# Altium PCB Misaka-v1.0.PcbDoc (part 1 of 2)
Units mm, origin at the board's own origin, x right, y up, seen from the top; angles counter-clockwise.
Board outline 100 x 100 mm, 2 copper layers (Top Layer, Bottom Layer); 149 components, 122 nets, 881 pads, 13 vias.
Unrouted connection lines stored in the file: 482.
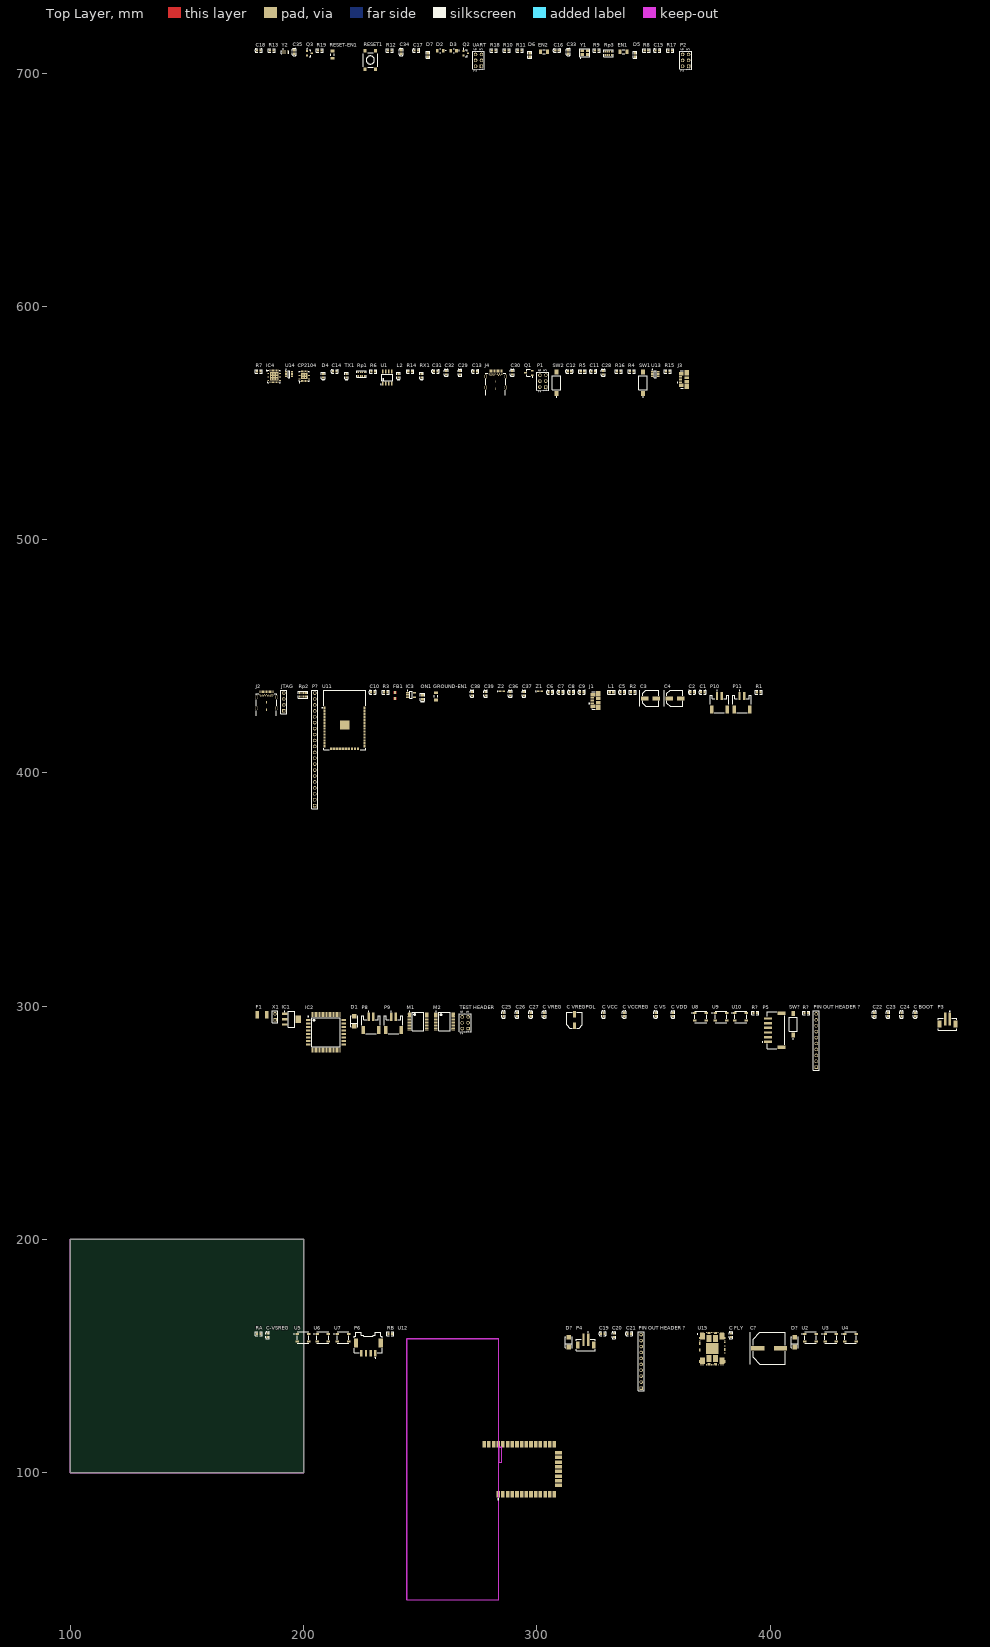
[diagram p0: Top Layer view]
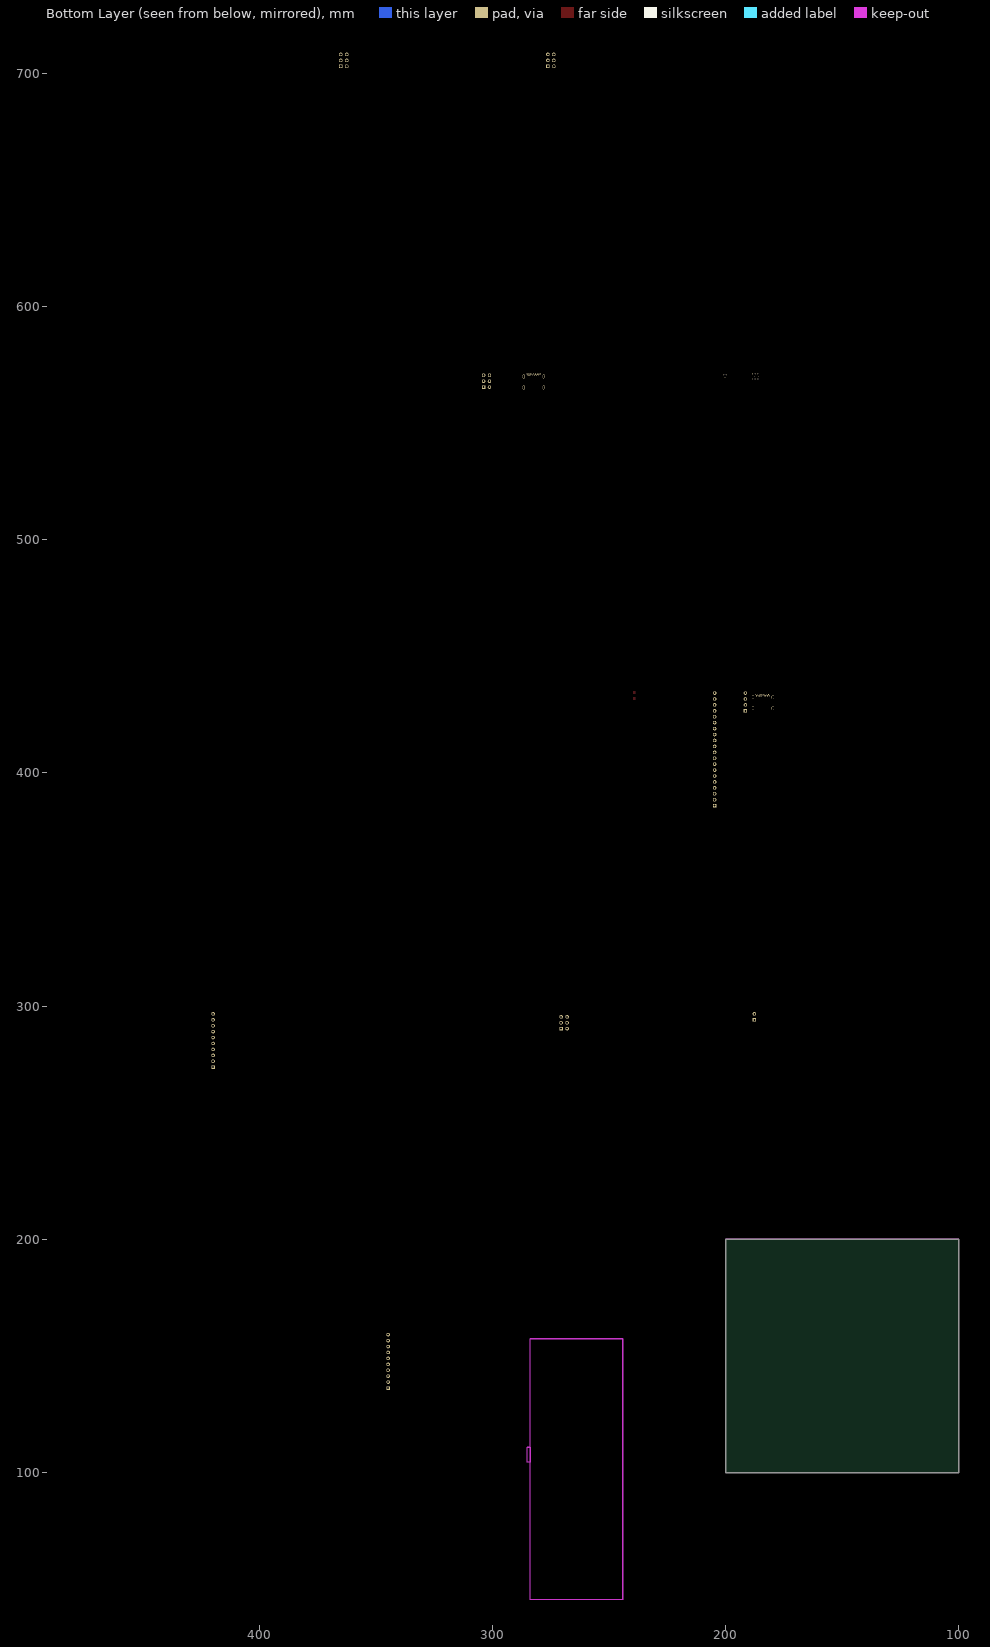
[diagram p1: Bottom Layer view, seen from below]

## Layer stack, top to bottom
Top Solder: solder mask 0.0102, Solder Resist, Dk 3.5
Top Layer: signal copper 0.0356
Dielectric 1: dielectric 0.32, FR-4, Dk 4.8
Bottom Layer: signal copper 0.0356
Bottom Solder: solder mask 0.0102, Solder Resist, Dk 3.5

## Board outline
100,100 100,200 200,200 200,100

## Design rules (kind name [scope] priority, off if disabled: settings)
Clearance [All] p1: gap=0.254 ignorepadtopadclearanceinfootprint=FALSE except(0: Arc-Hole Track-SMDPad Track-Hole SMDPad-Fill SMDPad-Poly SMDPad-Region SMDPad-Hole THPad-Hole Via-Hole Fill-Hole Poly-Hole Region-Hole Text-Hole; 0.15: THPad-THPad; 0.2: SMDPad-SMDPad; 0.253: SMDPad-THPad)
PolygonConnect [All] p1: connectstyle=Relief reliefconductorwidth=0.254 reliefentries=4 polygonreliefangle="90 Angle" airgapwidth=0.254
RoomDefinition Misaka-v1.0 [InComponentClass('Misaka-v1.0')] p1: confinementstyle=ConfineIn formatcopy=TRUE lockcomponents=FALSE outline 178.943,26.924 480.568,26.924 480.568,713.359 178.943,713.359
RoutingVias [All] p1: holewidth=0.711 width=1.27 viastyle="Through Hole" minholewidth=0.711 minwidth=1.27 maxholewidth=0.711 maxwidth=1.27
SolderMaskExpansion [All] p1: expansion=0.102 istentingtop=FALSE
Width [All] p1: maxlimit=0.254 minlimit=0.254 preferedwidth=0.254
30 further rules are at their usual default settings.

## Components (designator, comment, footprint, x,y, rotation, side; value= is the part's Value field where it differs from the comment)
C1 "100nF" 0603_C 371.094,434.594 r0 top
C2 "100nF" 0603_C 366.522,434.594 r0 top
C3 "EEEFP1V470AP" PNSC-FP-V-D_V 348.742,431.927 r0 top
C4 "EEEFP1V470AP" PNSC-FP-V-D_V 359.156,431.927 r0 top
C5 "1uF (105) 10% 50V" 0603_C 336.55,434.594 r0 top
C6 "100nF" 0603_C 305.689,434.594 r0 top
C7 "100nF" 0603_C 310.261,434.594 r0 top
C8 "100nF" 0603_C 314.706,434.594 r0 top
C9 "100nF" 0603_C 319.278,434.594 r0 top
C10 "1uF (105) 10% 50V" 0603_C 229.616,434.594 r0 top
C11 "100nF" 0603_C 324.104,572.135 r0 top
C12 "100nF" 0603_C 313.944,572.135 r0 top
C13 "100nF" 0603_C 273.558,572.135 r0 top
C14 "100nF" 0603_C 213.36,572.135 r0 top
C15 "22pF (220) 5% 50V" 0603_C 351.536,709.676 r0 top
C16 "22pF (220) 5% 50V" 0603_C 308.61,709.676 r0 top
C17 "22pF (220) 5% 50V" 0603_C 248.285,709.676 r0 top
C18 "100nF" 0603_C 180.721,709.676 r0 top
C19 "100nF (104) 10% 50V" 0603_C 328.168,159.512 r0 top
C20 "100nF (104) 10% 50V" 0603_C 332.994,158.877 r90 top
C21 "100nF (104) 10% 50V" 0603_C 339.598,159.512 r0 top
C22 "100nF (104) 10% 50V" 0603_C 444.627,296.418 r90 top
C23 "100nF (104) 10% 50V" 0603_C 450.469,296.418 r90 top
C24 "100nF (104) 10% 50V" 0603_C 456.311,296.418 r90 top
C25 "100nF (104) 10% 50V" 0603_C 285.623,296.418 r90 top
C26 "100nF (104) 10% 50V" 0603_C 291.465,296.418 r90 top
C27 "100nF (104) 10% 50V" 0603_C 297.307,296.418 r90 top
C28 "100nF (104) 10% 50V" 0603_C 328.422,571.5 r90 top
C29 "100nF (104) 10% 50V" 0603_C 266.954,571.5 r90 top
C30 "100nF (104) 10% 50V" 0603_C 289.433,571.5 r90 top
C31 "10uF (106) 10% 10V" 0603_C 256.54,572.135 r0 top
C32 "100nF (104) 10% 50V" 0603_C 261.112,571.5 r90 top
C33 "4.7uF" 0603_C 313.436,709.041 r90 top
C34 "100nF (104) 10% 50V" 0603_C 241.808,709.041 r90 top
C35 "1uF (105) 10% 50V" 0603_C 195.961,709.041 r90 top
C36 "100nF (104) 10% 50V" 0603_C 288.544,433.959 r90 top
C37 "100nF (104) 10% 50V" 0603_C 294.386,433.959 r90 top
C38 "10uF (106) 10% 10V" 0603_C 272.161,433.959 r90 top
C39 "10uF (106) 10% 10V" 0603_C 278.003,433.959 r90 top
"C BOOT" "470nF (474) 10% 25V" 0603_C 462.153,296.418 r90 top
"C FLY" "47nF (473) 10% 50V" 0603_C 383.159,158.877 r90 top
"C VCC" "470nF (474) 10% 25V" 0603_C 328.549,296.418 r90 top
"C VCCREG" "100nF (104) 10% 50V" 0603_C 337.439,296.418 r90 top
"C VDD" "100nF (104) 10% 50V" 0603_C 358.267,296.418 r90 top
"C VREG" "100nF (104) 10% 50V" 0603_C 303.149,296.418 r90 top
"C VREGPOL" "EEE-FK1H220P" PNSC-EEE-FK1H220P_L 316.103,294.005 r90 top
"C VS" "220nF (224) 10% 25V" 0603_C 350.901,296.418 r90 top
C-VSREG "100nF (104) 10% 50V" 0603_C 184.531,158.877 r90 top
C? "EEVFK1J221Q" PNSC-FK-V-H13_V 399.542,153.289 r0 top
CP2104 "CP2104-F03-GM" SLAB-QFN-24-2675x2675TP_M 200.279,570.103 r90 top
D1 "M7" SMA(DO-214AC)_S1 221.615,293.497 r90 top
D2 "CD1206-S01575" BOUR-CD1206-S01575-2_L 258.572,709.676 r0 top
D3 "CD1206-S01575" BOUR-CD1206-S01575-2_L 264.287,709.676 r0 top
D4 "白灯 0603" 0603_LED_S1 208.407,570.23 r90 top
D5 "白灯 0603" 0603_LED_S1 342.011,707.771 r90 top
D6 "白灯 0603" 0603_LED_S1 296.926,707.771 r90 top
D7 "白灯 0603" 0603_LED_S1 253.238,707.771 r90 top
D? "M7" SMA(DO-214AC)_S1 410.464,155.956 r90 top
D? "M7" SMA(DO-214AC)_S1 313.69,155.956 r90 top
EN1 "RC1206JR-070RL" RESC3116X65X40ML10T20 337.058,709.168 r0 top
EN2 "RC1206JR-070RL" RESC3116X65X40ML10T20 303.022,709.168 r0 top
F1 "SMD1812P050TF" BOUR-MF-MSMF050-2_V 182.118,296.291 r0 top
FB1 "BLM21PG300SN1D" MURA-BLM21-B40-CHIP-2_V2 239.141,433.197 r90 top
GROUND-EN1 "RC1206JR-070RL" RESC3116X65X40ML10T20 256.667,432.816 r90 top
IC1 "LD1117S50CTR" SOT-223_N 194.691,294.386 r0 top
IC2 "ATmega2560-16AU" 100A_M 209.55,288.798 r0 top
IC3 "LP2985-33DBVR" DBV0005A_M 245.999,433.451 r0 top
IC4 "ATmega16U2-MU" 32PG_N 187.325,569.976 r0 top
J1 "47346-0001" MOLX-47346-0001-5_V 326.136,431.038 r90 top
J2 "USB 3.1 C TYPE DIP+SMT CONN" 632723100011 184.023,428.879 r0 top
J3 "47346-0001" MOLX-47346-0001-5_V 363.982,568.579 r90 top
J4 "USB 3.1 C TYPE DIP+SMT CONN" 632723100011 282.321,566.42 r0 top
JTAG "Header 4" HDR1X4 191.516,426.593 r90 top
L1 "10uH ±10%" 0603_L 331.978,434.594 r0 top
L2 "黄灯 0603" 0603_LED_S1 240.665,570.23 r90 top
M1 "TB6612FNG(O,C,8,EL" TOSH-SSOP24-P-300-0.65A_M 249.047,293.37 r0 top
M2 "TB6612FNG(O,C,8,EL" TOSH-SSOP24-P-300-0.65A_M 260.35,293.37 r0 top
ON1 "翠绿 0805" 0805_LED_S1 250.952,432.435 r90 top
P1 "Header 3X2" HDR2X3 303.784,565.404 r90 top
P2 "Header 3X2" HDR2X3 364.998,702.945 r90 top
P3 "B2B-PH-SM4-TB(LF)(SN)" JST-B2B-PH-SM4-TB-2_V 475.996,292.227 r0 top
P4 "PH2.0-2P，立贴" JST-B2B-PH-SM4-TB-2_V 320.929,154.686 r0 top
P5 "带编码器的电机6Pin PH-2" JST-S6B-PH-SM4-TB(LF)(SN)_V 401.955,289.687 r90 top
P6 "SM04B-PASS-TBT(LF)(SN)" JST-SM04B-PASS-TBT(LF)(SN)_V 227.711,155.829 r0 top
P8 "S2B-PH-SM4-TB(LF)(SN)" "JST- S2B-PH-SM4-TB(LF)(SN)-2_V" 228.854,291.973 r0 top
P9 "S2B-PH-SM4-TB(LF)(SN)" "JST- S2B-PH-SM4-TB(LF)(SN)-2_V" 238.506,291.973 r0 top
P10 "S2B-PH-SM4-TB(LF)(SN)" "JST- S2B-PH-SM4-TB(LF)(SN)-2_V" 378.206,429.514 r0 top
P11 "S2B-PH-SM4-TB(LF)(SN)" "JST- S2B-PH-SM4-TB(LF)(SN)-2_V" 387.858,429.514 r0 top
P? "Header 20" HDR1X20 204.724,385.953 r90 top
"PIN OUT HEADER ?" "Header 10" HDR1X10 419.735,273.812 r90 top
"PIN OUT HEADER ?" "Header 10" HDR1X10 344.678,136.271 r90 top
Q1 "AO3401A P道沟 X13A15 SOT-23" SOT-23-3L 296.545,571.5 r0 top
Q2 "S8050" ONSC-SOT-23-3-318-08_V 269.494,708.533 r0 top
Q3 "S8050" ONSC-SOT-23-3-318-08_V 202.438,708.533 r0 top
R1 "22Ω (22R0) ±1%" 0603_R 395.097,434.594 r0 top
R2 "22Ω (22R0) ±1%" 0603_R 341.122,434.594 r0 top
R3 "1KΩ (1001) ±1%" 0603_R 235.204,434.594 r0 top
R4 "10KΩ (1002) ±1%" 0603_R 340.614,572.135 r0 top
R5 "10KΩ (1002) ±1%" 0603_R 319.532,572.135 r0 top
R6 "1KΩ (1001) ±1%" 0603_R 229.87,572.135 r0 top
R7 "10KΩ (1002) ±1%" 0603_R 180.721,572.135 r0 top
R8 "10KΩ (1002) ±1%" 0603_R 346.964,709.676 r0 top
R9 "1MΩ (1004) ±1%" 0603_R 325.628,709.676 r0 top
R10 "10KΩ (1002) ±1%" 0603_R 287.02,709.676 r0 top
R11 "10KΩ (1002) ±1%" 0603_R 292.608,709.676 r0 top
R12 "1MΩ (1004) ±1%" 0603_R 236.855,709.676 r0 top
R13 "1KΩ (1001) ±1%" 0603_R 186.309,709.676 r0 top
R14 "10KΩ (1002) ±1%" 0603_R 245.618,572.135 r0 top
R15 "22KΩ (2202) ±1%" 0603_R 356.108,572.135 r0 top
R16 "47KΩ (4702) ±1%" 0603_R 335.026,572.135 r0 top
R17 "4.7KΩ (4701) ±1%" 0603_R 357.124,709.676 r0 top
R18 "1KΩ (1001) ±1%" 0603_R 281.432,709.676 r0 top
R19 "1KΩ (1001) ±1%" 0603_R 206.883,709.676 r0 top
R? "39KΩ (3902) ±1%" 0603_R 393.573,297.053 r0 top
R? "39KΩ (3902) ±1%" 0603_R 415.417,297.053 r0 top
RA "15KΩ (1502) ±1%" 0603_R 180.721,159.512 r0 top
RB "100KΩ (1003) ±1%" 0603_R 237.109,159.512 r0 top
RESET1 "轻触开关 6*6" 430152043836 228.6,705.612 r90 top
RESET-EN1 "RC1206JR-070RL" RESC3116X65X40ML10T20 212.344,707.898 r90 top
Rp1 "1KΩ (102) ±5%" 0603_Rx4 224.79,570.992 r0 top
Rp2 "470Ω (471) ±5%" 0603_Rx4 199.644,433.451 r0 top
Rp3 "1KΩ (102) ±5%" 0603_Rx4 330.708,708.533 r0 top
RX1 "黄灯 0603" 0603_LED_S1 250.571,570.23 r90 top
SW1 "3×6贴片轻触开关" TECO-FSMSM-2_V 345.44,567.309 r90 top
SW2 "3×6贴片轻触开关" TECO-FSMSM-2_V 308.356,567.309 r90 top
SW? "3×6贴片轻触开关" TECO-FSMSM-2_V 409.829,292.227 r90 top
"TEST HEADER" "Header 3X2" HDR2X3 270.51,290.322 r90 top
TX1 "黄灯 0603" 0603_LED_S1 218.313,570.23 r90 top
U1 "LM358DR2G" SOIC-8_150mil 235.839,569.468 r0 top
U2 "WS2812B" ADA-RGB-1655_V 417.322,157.861 r0 top
U3 "WS2812B" ADA-RGB-1655_V 425.958,157.861 r0 top
U4 "WS2812B" ADA-RGB-1655_V 434.467,157.861 r0 top
U5 "WS2812B" ADA-RGB-1655_V 199.644,157.861 r0 top
U6 "WS2812B" ADA-RGB-1655_V 208.153,157.861 r0 top
U7 "WS2812B" ADA-RGB-1655_V 216.789,157.861 r0 top
U8 "WS2812B" ADA-RGB-1655_V 370.205,295.402 r0 top
U9 "WS2812B" ADA-RGB-1655_V 378.841,295.402 r0 top
U10 "WS2812B" ADA-RGB-1655_V 387.35,295.402 r0 top
U11 "ESP-WROOM-32" OLMX-ESP-WROOM-32 217.551,419.1 r0 top
U12 "XB24CZ7RIS-004" DIGI-XB24CZ7RIS-004-Module-37_V 292.608,101.473 r90 top
U13 "SRV05-4HTG" LFUS-SOT23-6_V 350.774,570.992 r0 top
U14 "SRV05-4HTG" LFUS-SOT23-6_V 193.675,570.992 r0 top
U15 "POWERSTEP01" STM-VFQFPN-102_V 375.158,153.162 r0 top
UART "Header 3X2" HDR2X3 276.225,702.945 r90 top
X1 "Header 2" HDR1X2 187.706,294.132 r90 top
Y1 "16MHZ 9PF 10PPM" SMD-3225_4P 320.548,708.787 r0 top
Y2 "CSTCE16M0V53-R0" MURA-CSTCE_V-3_V 192.024,709.041 r0 top
Z1 "CG0603MLC-05E" BOUR-CG0603-2_V 301.371,434.975 r0 top
Z2 "CG0603MLC-05E" BOUR-CG0603-2_V 284.988,434.975 r0 top

## Footprints (in the part's own frame and the unit in brackets; to place one, negate y for a bottom-side part, rotate by r counter-clockwise, add the part's x,y. Pads: shape width x height; smd on the part's side, far side on the other; paste and mask are expansions set on the pad)
32PG_N [mm] "QFN, 32-Leads, Body 5x5mm, Pitch 0.5mm, Thermal Pad 3.7x3.7mm, IPC Medium Density"
  oval 0.75x0.2 smd: 1(-2.525,1.75) 2(-2.525,1.25) 3(-2.525,0.75) 4(-2.525,0.25) 5(-2.525,-0.25) 6(-2.525,-0.75) 7(-2.525,-1.25) 8(-2.525,-1.75) 17(2.525,-1.75) 18(2.525,-1.25) 19(2.525,-0.75) 20(2.525,-0.25) 21(2.525,0.25) 22(2.525,0.75) 23(2.525,1.25) 24(2.525,1.75)
  oval 0.2x0.75 smd: 9(-1.75,-2.525) 10(-1.25,-2.525) 11(-0.75,-2.525) 12(-0.25,-2.525) 13(0.25,-2.525) 14(0.75,-2.525) 15(1.25,-2.525) 16(1.75,-2.525) 25(1.75,2.525) 26(1.25,2.525) 27(0.75,2.525) 28(0.25,2.525) 29(-0.25,2.525) 30(-0.75,2.525) 31(-1.25,2.525) 32(-1.75,2.525)
  rect 3.7x3.7 smd: 33(0,0)
  silkscreen extent -3.47,-2.7 2.7,2.7, body extent -2.55,-2.55 2.55,2.55, height 1
100A_M [mm] "Thin QFP, 100-Leads, Body 14x14mm, Pitch 0.5mm, IPC Low Density"
  oval 2.1x0.3 smd: 1(-7.6,6) 2(-7.6,5.5) 3(-7.6,5) 4(-7.6,4.5) 5(-7.6,4) 6(-7.6,3.5) 7(-7.6,3) 8(-7.6,2.5) 9(-7.6,2) 10(-7.6,1.5) 11(-7.6,1) 12(-7.6,0.5) 13(-7.6,0) 14(-7.6,-0.5) 15(-7.6,-1) 16(-7.6,-1.5) 17(-7.6,-2) 18(-7.6,-2.5) 19(-7.6,-3) 20(-7.6,-3.5) 21(-7.6,-4) 22(-7.6,-4.5) 23(-7.6,-5) 24(-7.6,-5.5) 25(-7.6,-6) 51(7.6,-6) 52(7.6,-5.5) 53(7.6,-5) 54(7.6,-4.5) 55(7.6,-4) 56(7.6,-3.5) 57(7.6,-3) 58(7.6,-2.5) 59(7.6,-2) 60(7.6,-1.5) 61(7.6,-1) 62(7.6,-0.5) 63(7.6,0) 64(7.6,0.5) 65(7.6,1) 66(7.6,1.5) 67(7.6,2) 68(7.6,2.5) 69(7.6,3) 70(7.6,3.5) 71(7.6,4) 72(7.6,4.5) 73(7.6,5) 74(7.6,5.5) 75(7.6,6)
  oval 0.3x2.1 smd: 26(-6,-7.6) 27(-5.5,-7.6) 28(-5,-7.6) 29(-4.5,-7.6) 30(-4,-7.6) 31(-3.5,-7.6) 32(-3,-7.6) 33(-2.5,-7.6) 34(-2,-7.6) 35(-1.5,-7.6) 36(-1,-7.6) 37(-0.5,-7.6) 38(0,-7.6) 39(0.5,-7.6) 40(1,-7.6) 41(1.5,-7.6) 42(2,-7.6) 43(2.5,-7.6) 44(3,-7.6) 45(3.5,-7.6) 46(4,-7.6) 47(4.5,-7.6) 48(5,-7.6) 49(5.5,-7.6) 50(6,-7.6) 76(6,7.6) 77(5.5,7.6) 78(5,7.6) 79(4.5,7.6) 80(4,7.6) 81(3.5,7.6) 82(3,7.6) 83(2.5,7.6) 84(2,7.6) 85(1.5,7.6) 86(1,7.6) 87(0.5,7.6) 88(0,7.6) 89(-0.5,7.6) 90(-1,7.6) 91(-1.5,7.6) 92(-2,7.6) 93(-2.5,7.6) 94(-3,7.6) 95(-3.5,7.6) 96(-4,7.6) 97(-4.5,7.6) 98(-5,7.6) 99(-5.5,7.6) 100(-6,7.6)
  silkscreen extent -7.72,-6.15 6.15,6.82, body extent -7,-7 7,7, height 1.6
0603_C [mm]
  rect 0.93x0.98 smd: 1(-0.77,0) 2(0.77,0)
  silkscreen extent -1.53,-0.79 1.54,0.79, body extent -0.8,-0.4 0.8,0.4, height 0.3
0603_L [mm]
  rect 0.93x0.98 smd: 1(-0.77,0) 2(0.77,0)
  silkscreen extent -1.53,-0.79 1.54,0.79, body extent -0.82,-0.41 0.83,0.41, height 0.46
0603_LED_S1 [mm]
  rect 0.93x0.98 smd: A(0.77,0) K(-0.77,0)
  silkscreen extent -1.98,-0.79 1.54,0.79, body extent -0.8,-0.4 0.8,0.4, height 0.6
0603_R [mm]
  rect 0.93x0.98 smd: 1(-0.77,0) 2(0.77,0)
  silkscreen extent -1.53,-0.79 1.54,0.79, body extent -0.85,-0.4 0.85,0.4, height 0.56
0603_Rx4 [mm]
  rect 0.75x0.8 smd mask+0.051: 1(-1.35,-0.77) 4(1.35,-0.77) 5(1.35,0.77) 8(-1.35,0.77)
  rect 0.58x0.8 smd mask+0.051: 2(-0.4,-0.77) 3(0.4,-0.77) 6(0.4,0.77) 7(-0.4,0.77)
  silkscreen extent -2.02,-1.47 2.02,1.47, body extent -1.6,-0.8 1.6,0.8, height 0.55
0805_LED_S1 [mm]
  rect 1.16x1.47 smd: A(0.89,0) K(-0.89,0)
  silkscreen extent -2.24,-1.04 1.77,1.03, body extent -1.01,-0.62 1.01,0.62, height 1.1
430152043836 [mm] "6*6mm vertical type, SMD, height 4.3mm, salmon actuator, 360gf, T&R"
  rect 1.55x1.3 smd: 1(-3.975,2.25) 2(-3.975,-2.25) 3(3.975,2.25) 4(3.975,-2.25)
  silkscreen extent -3.1,-3.1 3.1,3.1, body extent -4.5,-3.1 4.5,3.1, height 4.29
632723100011 [mm] "USB 3.1 Type C Receptacle Horizontal THR"
  rect 0.3x1.2 smd: A1(-2.75,5.93) A2(-2.25,5.93) A3(-1.75,5.93) A4(-1.25,5.93) A5(-0.75,5.93) A6(-0.25,5.93) A7(0.25,5.93) A8(0.75,5.93) A9(1.25,5.93) A10(1.75,5.93) A11(2.25,5.93) A12(2.75,5.93)
  round 0.65 hole 0.4: B1(2.8,4.68) B2(2.4,3.98) B3(1.6,3.98) B4(1.2,4.68) B5(0.8,3.98) B6(0.4,4.68) B7(-0.4,4.68) B8(-0.8,3.98) B9(-1.2,4.68) B10(-1.6,3.98) B11(-2.4,3.98) B12(-2.8,4.68) G1(2,4.68) G2(-2,4.68)
  oval 1x1.6 hole 0.6 slot 1.2 at 90 deg: Shell(-4.27,-1.2) Shell(-4.27,3.53) Shell(4.27,-1.2) Shell(4.27,3.53)
  rect 0.2x1 smd: Shell(0,-1.75) Shell(0,1.35)
  silkscreen extent -4.37,-4.45 4.34,5, body extent -4.37,-5.6 4.37,6.19, height 3.05
ADA-RGB-1655_V [mm] "SMD, 4-Leads, Body 5x5mm"
  rect 1.5x0.9 smd: 1(-2.45,1.65) 2(-2.45,-1.65) 3(2.45,-1.65) 4(2.45,1.65)
  silkscreen extent -3.87,-2.5 2.5,2.5, body extent -2.7,-2.5 2.7,2.5, height 1.68
BOUR-CD1206-S01575-2_L [mm] "Molded Diode, 2-Leads, Body 3.4x1.7mm, IPC High Density"
  rect 1.2x1.5 smd: 1(-1.275,0) 2(1.275,0)
  silkscreen extent -0.28,-0.85 2.32,0.85, body extent -1.7,-0.85 1.7,0.85, height 0.95
BOUR-CG0603-2_V [mm] "SMD, 2-Leads, Body 1.6x0.8mm, Pitch 1.52mm"
  rect 1.02x0.76 smd: 1(-0.76,0) 2(0.76,0)
  silkscreen extent -1.94,-0.12 -1.69,0.12, body extent -0.8,-0.4 0.8,0.4, height 0.55
BOUR-MF-MSMF050-2_V [mm] "SMD, 2-Leads, Body 4.55x3.24mm"
  rect 1.5x3.2 smd: 1(-2.1,0) 2(2.1,0)
  body extent -2.28,-1.62 2.28,1.62, height 0.85
DBV0005A_M [mm] "SOT23, 5-Leads, Body 3.05x1.75mm, Pitch 0.95mm, IPC Low Density"
  rrect15% 1.2x0.65 smd: 1(-1.475,0.95) 2(-1.475,0) 3(-1.475,-0.95) 4(1.475,-0.95) 5(1.475,0.95)
  silkscreen extent -1.6,-1.55 0.5,1.95, body extent -1.42,-1.46 1.42,1.46, height 1.08
DIGI-XB24CZ7RIS-004-Module-37_V [mil] "Module, 37-Leads, Body 21.996x33.782mm, Pitch 2.007mm"
  rect 112x60 smd: 1(-423,362) 2(-423,283) 3(-423,204) 4(-423,125) 5(-423,46) 6(-423,-33) 7(-423,-112) 8(-423,-191) 9(-423,-270) 10(-423,-349) 11(-423,-428) 12(-423,-507) 13(-423,-586) 22(423,-586) 23(423,-507) 24(423,-428) 25(423,-349) 26(423,-270) 27(423,-191) 28(423,-112) 29(423,-33) 30(423,46) 31(423,125) 32(423,204) 33(423,283) 34(423,362) 35(423,441) 36(423,520) 37(423,599)
  rect 60x112 smd: 14(-275,-655) 15(-196,-655) 16(-117,-655) 17(-38,-655) 18(41,-655) 19(120,-655) 20(199,-655) 21(278,-655)
  Keep-Out Layer region: -2200.59,350.75 2200.59,350.75 2200.59,1908.62 -2200.59,1908.62
  Keep-Out Layer region: 118.01,300 367.01,300 367.01,350.75 118.01,350.75
  Keep-Out Layer lines w3.94: -2200.59,1908.62 2200.59,1908.62 2200.59,350.75 367.01,350.75 367.01,300 118.01,300 118.01,350.75 -2200.59,350.75 -2200.59,1908.62
  silkscreen extent -520,352 -501,372, body extent -433,-665 433,665, height 120
HDR1X2 [mm] "Connector; Header; 2 Position"
  rect 1.5x1.5 hole 0.9: 1(0,0)
  round 1.5 hole 0.9: 2(2.54,0)
  silkscreen extent -1.27,-1.27 3.81,1.27
HDR1X4 [mm] "Connector; Header; 4 Position"
  rect 1.5x1.5 hole 0.9: 1(0,0)
  round 1.5 hole 0.9: 2(2.54,0) 3(5.08,0) 4(7.62,0)
  silkscreen extent -1.27,-1.27 8.89,1.27
HDR1X10 [mm] "Connector; Header; 10 Position"
  rect 1.5x1.5 hole 0.9: 1(0,0)
  round 1.5 hole 0.9: 2(2.54,0) 3(5.08,0) 4(7.62,0) 5(10.16,0) 6(12.7,0) 7(15.24,0) 8(17.78,0) 9(20.32,0) 10(22.86,0)
  silkscreen extent -1.27,-1.27 24.13,1.27
HDR1X20 [mm] "Connector; Header; 20 Position"
  rect 1.5x1.5 hole 0.9: 1(0,0)
  round 1.5 hole 0.9: 2(2.54,0) 3(5.08,0) 4(7.62,0) 5(10.16,0) 6(12.7,0) 7(15.24,0) 8(17.78,0) 9(20.32,0) 10(22.86,0) 11(25.4,0) 12(27.94,0) 13(30.48,0) 14(33.02,0) 15(35.56,0) 16(38.1,0) 17(40.64,0) 18(43.18,0) 19(45.72,0) 20(48.26,0)
  silkscreen extent -1.27,-1.27 49.53,1.27
HDR2X3 [mm] "Connector; Header; 3x2 Position"
  rect 1.5x1.5 hole 0.9: 1(0,0)
  round 1.5 hole 0.9: 2(0,2.54) 3(2.54,0) 4(2.54,2.54) 5(5.08,0) 6(5.08,2.54)
  silkscreen extent -1.27,-1.27 6.35,3.81
"JST- S2B-PH-SM4-TB(LF)(SN)-2_V" [mm] "SMD, 2-Leads, Body 7.9x7.6mm, Pitch 2mm"
  rect 1x3.5 smd: 1(-1,3.45) 2(1,3.45)
  rect 1.5x3.4 smd: MP1(-3.35,-2.3) MP2(3.35,-2.3)
  silkscreen extent -3.95,-3.8 3.95,5.87, body extent -3.95,-3.8 3.95,4.8, height 5.6
JST-B2B-PH-SM4-TB-2_V [mm] "SMD, 2-Leads, Body 7.95x5mm, Pitch 2mm"
  rect 1x5.5 smd: 1(1,2.25) 2(-1,2.25)
  rect 1.6x3 smd: MP1(3.4,0) MP2(-3.4,0)
  silkscreen extent -3.98,-2.5 3.98,5.67, body extent -3.97,-2.5 3.97,4.5, height 6.6
JST-S6B-PH-SM4-TB(LF)(SN)_V [mm] "SMD, 2-Leads, Body 15.9x7.6mm, Pitch 2mm"
  rect 1x3.5 smd: 1(-5,2.875) 2(-3,2.875) 3(-1,2.875) 4(1,2.875) 5(3,2.875) 6(5,2.875)
  rect 1.5x3.4 smd: MP1(-7.35,-2.875) MP2(7.35,-2.875)
  silkscreen extent -7.95,-4.37 7.95,5.3, body extent -7.95,-4.37 7.95,4.23, height 5.6
JST-SM04B-PASS-TBT(LF)(SN)_V [mm] "Header, 4-Leads, Body 12x8.9mm, Pitch 2mm"
  rect 1x2.7 smd: 1(3,-4.7) 2(1,-4.7) 3(-1,-4.7) 4(-3,-4.7)
  rect 1.8x3.8 smd: MP1(5.35,-0.25) MP2(-5.35,-0.25)
  silkscreen extent -6,-6.72 6,4.45, body extent -6,-5.55 6,4.45, height 5.8
LFUS-SOT23-6_V [mm] "SOT23, 6-Leads, Body 3x1.75mm, Pitch 0.95mm"
  rect 0.99x0.69 smd: 1(-1.295,0.95) 2(-1.295,0) 3(-1.295,-0.95) 4(1.295,-0.95) 5(1.295,0) 6(1.295,0.95)
  silkscreen extent -1.42,-1.5 0.4,1.97, body extent -0.88,-1.5 0.87,1.5, height 1.45
MOLX-47346-0001-5_V [mm] "SMD, 5-Leads, Body 7.5x5mm, Pitch 0.65mm"
  rect 0.45x1.38 smd: 1(-1.3,2.46) 2(-0.65,2.46) 3(0,2.46) 4(0.65,2.46) 5(1.3,2.46)
  rect 1.475x2.1 smd: 6(-2.462,2.1) 7(2.462,2.1)
  rect 2.375x1.9 smd: 8(-2.913,-0.2) 11(2.913,-0.2)
  rect 1.175x1.9 smd: 9(-0.837,-0.2) 10(0.837,-0.2)
  silkscreen extent -3.75,1.16 3.75,3.82, body extent -3.99,-2.78 3.99,2.65, height 2.69
MURA-BLM21-B40-CHIP-2_V2 [mm] "Chip Ferrite Bead, 2-Leads, Body 2x1.25mm, Height 1.05mm, 35um Land Pad Thickness, 3 to 4A Rated Current"
  rect 1.4x1 smd mask+0: 1(-1.3,0) 2(1.3,0)
  Top Layer region: 0.6,-0.6 2,-0.6 2,0.6 0.6,0.6
  Top Layer region: -2,-0.6 -0.6,-0.6 -0.6,0.6 -2,0.6
  body extent -1,-0.63 1,0.63, height 1.05
MURA-CSTCE_V-3_V [mm] "SMD, 3-Leads, Body 3.2x1.3mm, Pitch 0.95mm"
  rect 0.3x1.6 smd: 1(-0.95,0) 2(0,0) 3(0.95,0)
  silkscreen extent -1.6,-0.65 1.6,1.47, body extent -1.6,-0.65 1.6,0.65, height 1
OLMX-ESP-WROOM-32 [mm] "SMD, 38-Leads, Body 18x25.5mm, Pitch 1.27mm"
  rect 0.95x1 smd: 1(-8.575,8.78) 2(-8.575,7.51) 3(-8.575,6.24) 4(-8.575,4.97) 5(-8.575,3.7) 6(-8.575,2.43) 7(-8.575,1.16) 8(-8.575,-0.11) 9(-8.575,-1.38) 10(-8.575,-2.65) 11(-8.575,-3.92) 12(-8.575,-5.19) 13(-8.575,-6.46) 14(-8.575,-7.73) 17(-3.175,-8.78) 25(8.575,-7.73) 26(8.575,-6.46) 27(8.575,-5.19) 28(8.575,-3.92) 29(8.575,-2.65) 30(8.575,-1.38) 31(8.575,-0.11) 32(8.575,1.16) 33(8.575,2.43) 34(8.575,3.7) 35(8.575,4.97) 36(8.575,6.24) 37(8.575,7.51) 38(8.575,8.78)
  rect 4x4 smd: 1(0,1.395)
  rect 1x0.95 smd: 15(-5.715,-8.78) 16(-4.445,-8.78) 18(-1.905,-8.78) 19(-0.635,-8.78) 20(0.635,-8.78) 21(1.905,-8.78) 22(3.175,-8.78) 23(4.445,-8.78) 24(5.715,-8.78)
  silkscreen extent -9.72,-9.23 9,16.27, body extent -9.04,-9.25 9.04,16.29, height 3.04
ONSC-SOT-23-3-318-08_V [mm] "SOT23, 3-Leads, Body 2.92x1.3mm, Pitch 0.95mm"
  rect 0.9x0.8 smd: 1(-1,0.95) 2(-1,-0.95) 3(1,0)
  silkscreen extent -1.12,-1.46 0.65,2.02, body extent -0.65,-1.46 0.65,1.46, height 1.11
PNSC-EEE-FK1H220P_L [mm] "CAPAE, 2-Leads, Base 6.6x6.6mm, IPC High Density"
  rect 2.85x1.4 smd: 1(-2.45,0) 2(2.45,0)
  silkscreen extent -3.4,-3.4 3.4,3.4, body extent -3.5,-3.4 3.5,3.4, height 6.1
PNSC-FK-V-H13_V [mm] "CAPAE, 2-Leads, Body 13.70x13.70mm"
  rect 5.7x2 smd: 1(-4.85,0) 2(4.85,0)
  silkscreen extent -8.2,-6.85 6.85,6.85, body extent -7.5,-6.85 7.5,6.85, height 14
PNSC-FP-V-D_V [mm] "CAPAE, 2-Leads, Body 6.80x6.80mm"
  rect 3.2x1.6 smd: 1(-2.5,0) 2(2.5,0)
  silkscreen extent -4.6,-3.4 3.4,3.4, body extent -3.9,-3.4 3.9,3.4, height 6.1
RESC3116X65X40ML10T20 [mm] "Chip Resistor, 2-Leads, Body 3.10x1.60mm, IPC Low Density"
  rect 1.25x1.8 smd: 1(-1.525,0) 2(1.525,0)
  silkscreen extent -0.5,-0.8 0.5,0.8, body extent -1.6,-0.85 1.6,0.85, height 0.65
SLAB-QFN-24-2675x2675TP_M [mm] "QFN, 24-Leads, Body 4x4mm, Pitch 0.5mm, Thermal Pad 2.68x2.68mm, IPC Low Density"
  oval 0.8x0.2 smd: 1(-2.05,1.25) 2(-2.05,0.75) 3(-2.05,0.25) 4(-2.05,-0.25) 5(-2.05,-0.75) 6(-2.05,-1.25) 13(2.05,-1.25) 14(2.05,-0.75) 15(2.05,-0.25) 16(2.05,0.25) 17(2.05,0.75) 18(2.05,1.25)
  oval 0.2x0.8 smd: 7(-1.25,-2.05) 8(-0.75,-2.05) 9(-0.25,-2.05) 10(0.25,-2.05) 11(0.75,-2.05) 12(1.25,-2.05) 19(1.25,2.05) 20(0.75,2.05) 21(0.25,2.05) 22(-0.25,2.05) 23(-0.75,2.05) 24(-1.25,2.05)
  rect 2.68x2.68 smd: 25(0,0)
  silkscreen extent -2.92,-2.15 2.15,2.15, body extent -2,-2 2,2, height 0.8
SMA(DO-214AC)_S1 [mm]
  rect 2x2 smd: 1(2.1,0) 2(-2.1,0)
  silkscreen extent -2.35,-1.5 2.35,1.5
SMD-3225_4P [mm]
  rect 1.4x1.15 smd: 1(-1.1,-0.8) 2(1.1,-0.8) 3(1.1,0.8) 4(-1.1,0.8)
  silkscreen extent -2.1,-2.35 2.1,1.7, body extent -1.6,-1.25 1.6,1.25, height 0.61
SOIC-8_150mil [mm]
  oval 0.7x1.8 smd: 1(-1.905,-2.6) 2(-0.635,-2.6) 3(0.635,-2.6) 4(1.905,-2.6) 5(1.905,2.6) 6(0.635,2.6) 7(-0.635,2.6) 8(-1.905,2.6)
  silkscreen extent -2.9,-3.05 2.4,1.4
SOT-23-3L [mm] "http://www.aosmd.com/res/packaging_information/SOT-23-3L.pdf"
  rect 1.15x0.65 smd: 1(1.475,-0.95) 2(1.475,0.95) 3(-1.475,0)
  silkscreen extent -0.9,-1.95 1.6,1.55, body extent -0.9,-1.55 0.9,1.55, height 1.25
SOT-223_N [mm] "SOT223, 4-Leads, Body 6.5x3.5mm, Pitch 2.3mm, Lead Span 7mm, IPC Medium Density"
  rect 2.4x1 smd: 1(-2.9,2.3) 2(-2.9,0) 3(-2.9,-2.3)
  rect 2.4x3.3 smd: 4(2.9,0)
  silkscreen extent -3.02,-3.35 1.4,3.47, body extent -1.85,-3.35 1.85,3.35, height 1.8
STM-VFQFPN-102_V [mm] "QFN, 102-Leads, Body 11x14mm, Height 1mm"
  oval 0.6x0.2 smd: 1(-5.4,6.32) 2(-5.4,5.92) 3(-5.4,5.52) 4(-5.4,5.12) 5(-5.4,4.72) 6(-5.4,4.32) 7(-5.4,3.27) 8(-5.4,2.65) 9(-5.4,2.2) 10(-5.4,1.8) 11(-5.4,1.4) 12(-5.4,1) 13(-5.4,0.6) 14(-5.4,0.2) 15(-5.4,-0.2) 16(-5.4,-0.6) 17(-5.4,-1) 18(-5.4,-1.4) 19(-5.4,-1.8) 20(-5.4,-2.2) 21(-5.4,-2.65) 22(-5.4,-3.27) 23(-5.4,-4.32) 24(-5.4,-4.72) 25(-5.4,-5.12) 26(-5.4,-5.52) 27(-5.4,-5.92) 28(-5.4,-6.32) 47(5.4,-6.32) 48(5.4,-5.92) 49(5.4,-5.52) 50(5.4,-5.12) 51(5.4,-4.72) 52(5.4,-4.32) 53(5.4,-3.27) 54(5.4,-2.65) 55(5.4,-1.93) 56(5.4,-1.53) 57(5.4,-0.8) 58(5.4,-0.4) 59(5.4,0) 60(5.4,0.4) 61(5.4,1.13) 62(5.4,1.85) 63(5.4,2.25) 64(5.4,2.65) 65(5.4,3.27) 66(5.4,4.32) 67(5.4,4.72) 68(5.4,5.12) 69(5.4,5.52) 70(5.4,5.92) 71(5.4,6.32)
  oval 0.2x0.6 smd: 29(-4.93,-6.9) 30(-4.46,-6.9) 31(-4.06,-6.9) 32(-3.66,-6.9) 33(-2.51,-6.9) 34(-1.81,-6.9) 35(-1.41,-6.9) 36(-1.01,-6.9) 37(-0.31,-6.9) 38(0.32,-6.9) 39(1.02,-6.9) 40(1.42,-6.9) 41(1.82,-6.9) 42(2.52,-6.9) 43(3.67,-6.9) 44(4.07,-6.9) 45(4.47,-6.9) 46(4.93,-6.9) 72(4.93,6.9) 73(4.46,6.9) 74(4.06,6.9) 75(3.66,6.9) 76(2.51,6.9) 77(1.82,6.9) 78(1.42,6.9) 79(1.02,6.9) 80(0.32,6.9) 81(-0.32,6.9) 82(-1.01,6.9) 83(-1.42,6.9) 84(-1.82,6.9) 85(-2.51,6.9) 86(-3.66,6.9) 87(-4.07,6.9) 88(-4.46,6.9) 89(-4.93,6.9)
  rect 2.15x2.85 smd: 90(-4.085,5.255) 91(-4.085,-5.255) 94(4.085,-5.255) 95(4.085,5.255)
  rect 2.32x3.03 smd: 92(-1.38,-4.26) 93(1.38,-4.26) 96(1.38,4.26) 97(-1.38,4.26)
  rect 5.5x4.69 smd: 98(0,0)
  rect 1.16x0.69 smd: 99(-1.41,-6.545) 100(1.41,-6.545) 101(1.41,6.545) 102(-1.41,6.545)
  silkscreen extent -6.37,6.2 -6.12,6.44, body extent -5.5,-7 5.5,7, height 1
TECO-FSMSM-2_V [mm] "SMD, 2-Leads, Body 6x3.5mm, Pitch 9.19mm"
  rect 2.2x1.6 smd: 1(-4.595,0)
  rect 2.18x1.6 smd: 2(4.595,0)
  silkscreen extent -6.37,-1.75 3,1.75, body extent -4.98,-1.75 4.98,1.75, height 4.4
TOSH-SSOP24-P-300-0.65A_M [mm] "TSOP, 24-Leads, Body 8x5.8mm, Pitch 0.65mm, IPC Low Density"
  oval 1.6x0.45 smd: 1(-3.7,3.575) 2(-3.7,2.925) 3(-3.7,2.275) 4(-3.7,1.625) 5(-3.7,0.975) 6(-3.7,0.325) 7(-3.7,-0.325) 8(-3.7,-0.975) 9(-3.7,-1.625) 10(-3.7,-2.275) 11(-3.7,-2.925) 12(-3.7,-3.575) 13(3.7,-3.575) 14(3.7,-2.925) 15(3.7,-2.275) 16(3.7,-1.625) 17(3.7,-0.975) 18(3.7,-0.325) 19(3.7,0.325) 20(3.7,0.975) 21(3.7,1.625) 22(3.7,2.275) 23(3.7,2.925) 24(3.7,3.575)
  silkscreen extent -3.82,-4 2.5,4.47, body extent -3.8,-4 3.8,4, height 1.6

## Part data
C1 C2 C6 C7 C8 C9 C11 C12 C13 C14 C18 C19 C20 C21 C22 C23 C24 C25 C26 C27 C28 C29 C30 C32 C34 C36 C37 "C VCCREG" "C VDD" "C VREG" C-VSREG: library part "0603 100nF (104) 10% 50V", "贴片电容", Package=0603, SuppliersPartNumber=C14663, ComponentLink1Description=供应商链接, ComponentLink1URL=http://www.szlcsc.com/product/details_15331.html, Supplier=LC
C3 C4: library part CMP-2000-06216-1, "Aluminum Electrolytic Capacitor, 47 uF, +/- 20%, 35 V, 2-Pin SMD (Size Code D), -55 to 105 degC, RoHS, Tape and Reel", Capacitance=47µF, Case Size/Dimension=Ø6.3x5.8mm, ESR (Equivalent Series Resistance)=0.26O, Lifetime@Temperature=2000Hrs@105°C, Manufacturer=Panasonic, Operating Temp Range=-55to+105°C, Operating Temp-Max=105°C, Package Description="2-Pin Electrolytic Aluminum Capacitor, Body 6.6 x 6.6 mm", Package Reference=FP-V-D, Rated Voltage=35V, Ripple Current=300mA, Datasheet URL=http://industrial.panasonic.com/cdbs/www-data/pdf/RDE0000/ABA0000C1184.pdf, Datasheet Version=03/2016, Manufacturer URL=http://www.panasonic.com/, Mounting Technology=SurfaceMount, Package URL=http://industrial.panasonic.com/cdbs/www-data/pdf/RDE0000/DME0000COL48.pdf, Series=FP, Type=Can
C5 C10 C35: library part "0603 1uF (105) 10% 50V", "贴片电容", Package=0603, SuppliersPartNumber=C15849, ComponentLink1Description=供应商链接, ComponentLink1URL=http://www.szlcsc.com/product/details_16531.html, Supplier=LC
C15 C16 C17: library part "0603 22pF (220) 5% 50V", "贴片电容", Package=0603, SuppliersPartNumber=C1653, ComponentLink1Description=供应商链接, ComponentLink1URL=http://www.szlcsc.com/product/details_2005.html, Supplier=LC
C31 C38 C39: library part "0603 10uF (106) 10% 10V", "贴片电容", Package=0603, SuppliersPartNumber=C19702, ComponentLink1Description=供应商链接, ComponentLink1URL=http://www.szlcsc.com/product/details_20411.html, Supplier=LC
C33: library part "0603 4.7uF (475) 10% 16V", "贴片电容", Package=0603, SuppliersPartNumber=C19666, ComponentLink1Description=供应商链接, ComponentLink1URL=http://www.szlcsc.com/product/details_20375.html, Supplier=LC
"C BOOT" "C VCC": library part "0603 470nF (474) 10% 25V", "贴片电容", Package=0603, SuppliersPartNumber=C1623, ComponentLink1Description=供应商链接, ComponentLink1URL=http://www.szlcsc.com/product/details_1975.html, Supplier=LC
"C FLY": library part "0603 47nF (473) 10% 50V", "贴片电容", Package=0603, SuppliersPartNumber=C1622, ComponentLink1Description=供应商链接, ComponentLink1URL=http://www.szlcsc.com/product/details_1974.html, Supplier=LC
"C VREGPOL": library part CMP-2000-06209-1, "Cap Aluminum Lytic, 22 uF, +/- 20%, 6.3 to 100 V, -55 to 105 degC, 2-Pin SMD, RoHS, Tape and Reel", Capacitance=22µF, Case Size/Dimension=Ø6.3x5.8mm, Lifetime@Temperature=2000Hrs@105°C, Manufacturer=Panasonic, Operating Temp Range=-55to+105°C, Operating Temp-Max=105°C, Package Description="2-Pin Aluminum Electrolytic Capacitor, Base 6.6 x 6.6 mm, Height 6.10 mm", Rated Voltage=50V, Ripple Current=165mA, Datasheet URL=http://www.mouser.com/ds/2/315/ABA0000CE120-68386.pdf, Datasheet Version=03/2014, Impedance=0.88O, Manufacturer URL=http://www.panasonic.com/, Mounting Technology=SurfaceMount, Package Reference=EEE-FK1H220P, Series=FK, Type=Can
"C VS": library part "0603 220nF (224) 10% 25V", "贴片电容", Package=0603, SuppliersPartNumber=C21120, ComponentLink1Description=供应商链接, ComponentLink1URL=http://www.szlcsc.com/product/details_21832.html, Supplier=LC
C?: library part CMP-2000-06222-1, "Aluminum Electrolytic Capacitor, 220 uF, +/- 20%, 63 V, 2-Pin SMD (Size Code H13), -55 to 105 degC, RoHS, Tape and Reel", AE Capacitor Case=RadialCan-SMD, Capacitance=220µF, Capacitance Tolerance=±20%, Capacitor Case Style=SMD, Life Time @ Temperature=2000hours@105°C, Manufacturer=Panasonic, Operating life Time=2000h, Operating Temperature Max=105°C, Operating Temperature Min=-55°C, Operating Temperature Range=-55°Cto+105°C, Package / Case=H13, Package Description="2-Pin Electrolytic Aluminum Capacitor, Body 13.5 x 13.5 mm", Package Reference=FK-V-H13, Power Factor=0.08, Power Factor Frequency=120Hz, Ripple Current AC=800mA, Ripple Current Frequency=100kHz, Tolerance -=20%, Voltage Rating=63V, Capacitance Tolerance ±=±20%, Capacitor Terminals=SMD, Datasheet URL=https://industrial.panasonic.com/cdbs/www-data/pdf/RDE0000/ABA0000C1181.pdf, Datasheet Version=03/2016, Diameter=12.5mm, External Length / Height=13.5mm, Height=13.5mm, Impedance=0.16ohm, Lifetime @ Temperature=2000hours@105°C, Manufacturer URL=http://www.panasonic.com/, Mounting Technology=SurfaceMount, Operating Lifetime=2000h, Package URL=http://industrial.panasonic.com/cdbs/www-data/pdf/RDE0000/DME0000COL48.pdf, Packaging=CutTape, Product Range=PANASONIC-?????FK, Ripple Current Temperature=105°C, Series=FK, SVHC=NoSVHC(16-Dec-2013), Tolerance +=20%, Voltage Rating V DC=63V
CP2104: library part CMP-0511-00004-1, "Single-Chip USB to UART Bridge, 4 Dig I/O Pins, Internal Oscillator, 1024 Bytes EEPROM, -40 to 85 degC, 24-pin QFN", Manufacturer="Silicon Labs", Code_IPC=J-STD-020, Code_JEDEC=MO-220, ComponentLink1Description="Manufacturer URL", ComponentLink1URL=http://www.silabs.com/, ComponentLink2Description=Datasheet, ComponentLink2URL=http://www.silabs.com/Support%20Documents/TechnicalDocs/cp2104.pdf, ComponentLink3Description="Package Specification", ComponentLink3URL=http://www.silabs.com/Support%20Documents/TechnicalDocs/C8051F93x-92x.pdf, DatasheetVersion="Rev. 1.0", EEPROM="1024 Bytes", Internal Oscillator=TRUE, Mounting Technology="Surface Mount", PackageDescription="24-Pin Quad-Flat No-Leads Package, Body 4 x 4 mm, Pitch 0.5 mm", PackageReference=QFN-24, PartNumber=CP2104-F03-GM, Sub-Family="USB Bridges"
D1 D? D?: library part "SMA(DO-214AC) M7", "二极管", Package=SMA(DO-214AC), SuppliersPartNumber=C95872, ComponentLink1Description=供应商链接, ComponentLink1URL=http://www.szlcsc.com/product/details_2841.html, Notepad="1N4007 4007 编号C2464 已经停售, 使用新物料编号C95872", Supplier=LC
D2 D3: library part CMP-0583-00001-2, "75 V Small Signal Switching Diode, 150 mA, 2.5 uA, 1026 Molded Package, RoHS, Tape and Reel", Average Forward Current="150 mA", Capacitance Between Terminals (Max.)="3 pF", Forward Voltage (Max.)="1.00 V", Manufacturer=Bourns, Reverse Current (Max.)="2.5 uA", Reverse Voltage="75 V", ComponentLink1Description="Manufacturer URL", ComponentLink1URL=http://www.bourns.com/, ComponentLink2Description=Datasheet, ComponentLink2URL=http://www.bourns.com/data/global/pdfs/CD1206_S01575.pdf, ComponentLink3Description="Package Specification", ComponentLink3URL=http://www.bourns.com/data/global/pdfs/CD1206_S01575.pdf, DatasheetVersion="Rev. 06/11", Mounting Technology="Surface Mount", PackageDescription="2-Pin SMD, Body 3.2 x 1.5 mm", PackageReference=CD1206-S01575-2, Packing="Tape and Reel", PartNumber=CD1206-S01575, Reverse Recovery Time (Max.)="4 nS", RoHS=TRUE
D4 D5 D6 D7: library part "0603 白灯", "发光二极管", Package=0603, SuppliersPartNumber=C2290, ComponentLink1Description=供应商链接, ComponentLink1URL=http://www.szlcsc.com/product/details_2663.html, Supplier=LC
EN1 EN2 GROUND-EN1 RESET-EN1: library part CMP-2100-03681-1, "Chip Resistor, 0 Ohm, +/- 5%, -55 to 155 degC, 1206 (3216 Metric), RoHS, Tape and Reel", Case Code (Imperial)=1206, Case Code (Metric)=3216, Manufacturer=Yageo, Max Operating Temperature=155degC, Max Power Dissipation=250mW, Min Operating Temperature=-55degC, Package Description="2-Pin Surface Mount Device, Body 3.1 x 1.6 mm", Package Quantity=5000, Package Reference=1206.0, Resistance=0mOhm, Temperature Coefficient=200ppm/degreesC, Tolerance=5%, Voltage Rating=200V, Case/Package=1206, Composition=CarbonFilm, Contact Plating=Tin, Datasheet URL=http://www.yageo.com/documents/recent/PYu-RC_Group_51_RoHS_L_5.pdf, Datasheet Version="Rev. 5, 10/2016", Depth=1.6mm, Height=0.026inch, Lead Free=LeadFree, Length=3.1mm, Manufacturer URL=http://www.yageo.com/, Military Standard=Not, Number of Terminations=2, Packaging=TapeandReel, Power Rating=250mW, Radiation Hardening=No, REACH SVHC=Unknown, RoHSCompliant=true, Termination=SMD/SMT, Width=0.063inch
F1: library part CMP-2100-03653-1, "PTC Resettable Fuse, 15 V, 500 mA, -40 to 85 degC, 2-Pin SMD, RoHS, Tape and Reel", Case Code (Imperial)=1812, Case Code (Metric)=4532, Current Rating=100A, Manufacturer=Bourns, Max Operating Temperature=85degC, Min Operating Temperature=-40degC, Package Description="2-Pin Surface Mount Device, Body 4.55 x 3.24 mm", Package Quantity=2000, Package Reference=MF-MSMF050-2, Power Dissipation=800mW, Resistance=150mOhm, Supply Voltage=15V, Case/Package=1812, Contact Plating=Gold, Datasheet URL=http://www.bourns.com/docs/Product-Datasheets/mfmsmf.pdf, Datasheet Version="Rev. AG, 08/2016", Height=0.85mm, Lead Free=LeadFree, Length=4.73mm, Manufacturer URL=http://www.bourns.com/, Max Current Rating=100A, Mount=SurfaceMount, Number of Terminals=2, Packaging=TapeandReel, Radiation Hardening=No, REACH SVHC=NoSVHC, RoHSCompliant=true, Termination=SMD/SMT, Voltage Rating=15V, Voltage Rating (DC)=15V, Width=3.41mm
FB1: library part CMP-0686-00620-2, "Chip Ferrite Bead for Power Lines, 30 Ohm, 4000 mA, -55 to 125 degC, 2 x 1.25 x 1.05 mm SMD, Tape and Reel", DC Resistance="0.014 Ohm Max.", Manufacturer=Murata, Operating Temperature Range="-55 to 125 degC", Rated Current="4000 mA", ComponentLink1Description="Manufacturer URL", ComponentLink1URL=http://www.murata.com/, ComponentLink2Description=Datasheet, ComponentLink2URL=http://www.murata.com/products/catalog/pdf/c31e.pdf, ComponentLink3Description="Package Specification", ComponentLink3URL=http://www.murata.com/products/catalog/pdf/c31e.pdf, DatasheetVersion=08/2013, Impedance (at 100 MHz)="30 Ohm Typ.", Mounting Technology="Surface Mount", PackageDescription="2-Pin Chip, Body 2 x 1.25 mm", PackageReference=BLM21_H1050-2, Packing="Tape and Reel", PartNumber=BLM21PG300SN1D
IC1: library part CMP-0244-00311-1, "Low-dropout linear regulator 5V -LM1117IMPX-5.0 / Fixed Low Drop Positive Voltage Regulator, 5V, 4-Pin SOT-223, Tape and Reel", ComponentLink1Description="Manufacturer URL", ComponentLink1URL=http://www.st.com, ComponentLink2Description=Datasheet, ComponentLink2URL=http://www.st.com/internet/com/TECHNICAL_RESOURCES/TECHNICAL_LITERATURE/DATASHEET/CD00000544.pdf, DatasheetVersion=1/11/2011, PackageDescription="4-Pin SOT-223 Package, 6.5 x 3.5 mm Body, 2.3 mm Pitch, 7 mm Lead Span", PackageReference=SOT-223, PackageVersion=2010
IC2: library part CMP-0095-00210-2, "8-bit AVR Microcontroller, 4.5-5.5V, 16MHz, 256KB Flash, 4KB EEPROM, 8KB SRAM, 86 GPIO pins, 100-pin TQFP, Industrial Grade (-40°C to 85°C), Pb-Free", Code_JEDEC=MS-026-AED, ComponentLink1Description="Manufacturer URL", ComponentLink1URL=http://www.atmel.com/, ComponentLink2Description="ATmega640/1280/1281/2560/2561 Datasheet", ComponentLink2URL=http://www.atmel.com/dyn/resources/prod_documents/doc2549.pdf, ComponentLink3Description="ATmega640/1280/1281/2560/2561 Summary", ComponentLink3URL=http://www.atmel.com/dyn/resources/prod_documents/2549S.pdf, DatasheetVersion="revN, May-2011", PackageDescription="100-Pin Thin Profile Plastic Quad Flat Pack (TQFP), 14 x 14 x 1.0 mm Body, 0.5 mm Pitch", PackageReference=100A, PackageVersion="revD, Oct-2010", RevisionNote="DatasheetVersion & PackageVersion updated. URLs added."
IC3: library part CMP-0758-00080-2, "Single Output Low Noise LDO, 150 mA, Fixed 3.3 V Output, 1.5% Tolerance, 2.2 to 16 V Input, Low IQ, 5-Pin SOT-23 (DBV), -40 to 125 degC, Green (RoHS & no Sb/Br), Tape and Reel", Manufacturer="Texas Instruments", Operating Temperature Range (degC)="-40 to 125", Accuracy (%)=1.5, ComponentLink1Description="Manufacturer URL", ComponentLink1URL=http://www.ti.com/, ComponentLink2Description=Datasheet, ComponentLink2URL=http://www.ti.com/lit/ds/symlink/lp2985-50.pdf, ComponentLink3Description="Package Specification", ComponentLink3URL=http://www.ti.com/litv/pdf/mpds018j, DatasheetVersion=SLVS522N, Fixed Output Options (V)=3.3, Iout (Max) (A)=0.15, Iq (Typ) (mA)=0.85, Mounting Technology="Surface Mount", Output Options="Fixed Output", PackageDescription="5-Pin Plastic Small Outline, Body 2.9 x 1.6 mm, Pitch 0.95 mm", PackageReference=DBV0005A, PackageVersion=4073253-4/L, Packing="Tape and Reel", PartNumber=LP2985-33DBVR, RoHS=TRUE, Vdo (Typ) (mV)=280, Vin (V)="2.2 to 16"
IC4: library part CMP-0095-00115-3, "8-bit AVR Microcontroller, 2.7-5.5V, 16KB Flash, 512 Bytes EEPROM, 512 Bytes SRAM, 32-pin VQFN, Industrial Grade (-40°C to 85°C)", Code_JEDEC=MO-220WHHD-2, ComponentLink1Description="Manufacturer URL", ComponentLink1URL=http://www.atmel.com/, ComponentLink2Description="ATmega8U2/16U2/32U2 Datasheet", ComponentLink2URL=http://www.atmel.com/dyn/resources/prod_documents/doc7799.pdf, ComponentLink3Description="ATmega8U2/16U2/32U2 Summary", ComponentLink3URL=http://www.atmel.com/dyn/resources/prod_documents/7799S.pdf, DatasheetVersion="revD, Nov-2010", PackageDescription="32-Pin Quad Flat No-Lead (QFN) Sawn,  5 x 5 x 1.0 mm Body, Pitch 0.50 mm, 3.60mm Exposed Pad", PackageReference=32PG, PackageVersion="revA, Oct-2008", PartNumber=ATmega16U2-MU, RevisionNote="Schematic symbol corrected"
J1 J3: library part CMP-2000-05246-1, "Micro-USB B Receptacle with Flange, -30 to 85 degC, 5-Pin SMD, RoHS, Tape and Reel", Color=Black, Manufacturer=Molex, Maximum Current Rating=1.8/ContactA, Maximum Voltage Rating=30VAC, Operating Temperature=-30to85C, Body Orientation=RightAngle, Contact Material=CopperAlloy, Contact Plating=GoldOverPalladiumNickelOverNickel, Datasheet URL=https://datasheet.ciiva.com/30075/304740473460001-io-nectors-30075527.pdf, Datasheet Version=Dec-13, Dimension=7.8x5.43x2.94mm, Gender=RCP, Housing Material=LiquidCrystalPolymer, Manufacturer URL=http://www.molex.com/, Mounting=SurfaceMount, Number of Contacts=5, Number of Ports=1, Number of Terminals=5, Packaging=EmbossedTapeandReel, Part No=47346-0001, Pitch=0.65mm, RoHS=Yes, Termination Method=Solder, Type=MicroUSBTypeB
J2 J4: library part CMP-1502-03213-1, "USB 3.1 Type C Receptacle WR-COM, Horizontal, SMT / THT", Contact Resistance=30mOhm, Manufacturer="Wurth Elektronik", Operating Temperature=-40to105degC, Package Reference=632723100011, Rated Current=5A, Working Voltage=20VDC, Connector Type=USB3.1TypeC, Datasheet URL=https://katalog.we-online.de/em/datasheet/632723x00011%282%29.pdf, Gender=Receptacle, Manufacturer URL=https://item.szlcsc.com/292999.html, Mounting Technology=SMT/THT, Orientation=Horizontal, Packaging=TapeandReel, Part Number=632723100011, Publisher=WurthElektronik
JTAG: "Header, 4-Pin", LatestRevisionDate=17-Jul-2002, LatestRevisionNote="Re-released for DXP Platform.", Publisher="Altium Limited"
L1: library part "0603 10uH 10%", "贴片电感", Package=0603, SuppliersPartNumber=C1035, ComponentLink1Description=供应商链接, ComponentLink1URL=http://www.szlcsc.com/product/details_1387.html, Supplier=LC
L2 RX1 TX1: library part "0603 黄灯", "发光二极管", Package=0603, SuppliersPartNumber=C72038, ComponentLink1Description=供应商链接, ComponentLink1URL=http://www.szlcsc.com/product/details_73147.html, Supplier=LC
M1 M2: library part CMP-2100-03693-1, "Toshiba Bi-CD Integrated Circuit Silicon Monolithicr, 2.7 to 5.5 V, 1 A, -20 to 85 degC, 24-Pin SSOP, RoHS, Tape and Reel", Manufacturer=Toshiba, Package Description="24-Pin Shrink Small Outline Package Integrated Circuit, Body 7.8 x 5.6 mm, Pitch 0.65 mm", Package Reference=SSOP24-P-300-0.65A, Datasheet URL=https://toshiba.semicon-storage.com/info/docget.jsp?did=10660&prodName=TB6612FNG, Datasheet Version=41913.0, Manufacturer URL=http://www.toshiba.com/
ON1: library part "0805 翠绿", "发光二极管", Package=0805, SuppliersPartNumber=C2297, ComponentLink1Description=供应商链接, ComponentLink1URL=http://www.szlcsc.com/product/details_2670.html, Supplier=LC
P1 P2 "TEST HEADER" UART: "Header, 3-Pin, Dual row", LatestRevisionDate=17-Jul-2002, LatestRevisionNote="Re-released for DXP Platform.", Publisher="Altium Limited"
P3: library part CMP-2000-05163-1, "Male Header, Pitch 2 mm, 1 x 2 Position, Height 6.6 mm, RoHS, Tape and Reel", Manufacturer=JST, Datasheet URL=https://ciiva.com/datasheet-click-26894756?src=ciiva&sig=90099765, Datasheet Version=Dec-12, Manufacturer URL=http://www.jst.com/home2.html, No of Positions=2, Pitch=2mm, Style/Orientation=StraightHeader/Plug, Termination=Crimp, Type=ShroudedHeader
P4: library part CMP-2000-05163-1, "Male Header, Pitch 2 mm, 1 x 2 Position, Height 6.6 mm, RoHS, Tape and Reel / B2B-PH-SM4-TB(LF)(SN)", Manufacturer=JST, Datasheet URL=https://ciiva.com/datasheet-click-26894756?src=ciiva&sig=90099765, Datasheet Version=Dec-12, Manufacturer URL=http://www.jst.com/home2.html, No of Positions=2, Pitch=2mm, Style/Orientation=StraightHeader/Plug, Termination=Crimp, Type=ShroudedHeader
P5: library part CMP-2000-07027-1, "Male Header, Pitch 2 mm, 1 x 6 Position, Height 5.5 mm, -25 to 85 degC / S6B-PH-SM4-TB(LF)(SN)", Manufacturer=JST, Package Description="Male Header, Pitch 2 mm, 1 x 6 Position, Height 5.5 mm", Package Reference=S6B-PH-SM4-TB(LF)(SN), Datasheet URL=https://datasheet.ciiva.com/11747/0900766b80df0d9d-11747278.pdf, Datasheet Version=11/2008, Manufacturer URL=http://www.jst.com/home2.html, Mounting Technology=SurfaceMount, No of Positions=6, Pitch=2mm, Style/Orientation=RightAngleHeader/Plug, Termination=Solder, Type=ShroudedHeader
P6: library part CMP-2000-07078-1, "Male Header, Pitch 2 mm, 1 x 4 Position, Height 5.7 mm, -25 to 85 degC, RoHS, Tape and Reel", Manufacturer="Japan Solderless Terminals", Package Description="Male Header, Pitch 2 mm, 1 x 4 Position, Height 5.7 mm", Datasheet URL=http://www.jst-mfg.com/product/pdf/eng/ePA-F.pdf, Datasheet Version=03/2012, Manufacturer URL=http://www.jst-mfg.com/index_e.php, Mounting Technology=SurfaceMount, No of Positions=4, Package Reference=SM04B-PASS-TBT(LF)(SN), Pitch=2mm, Style/Orientation=RightAngleHeader/Plug, Termination=Crimp, Type=WiretoBoard
P8 P9 P10 P11: library part CMP-1755-00001-1, "Male Header, Pitch 2 mm, 1 x 2 Position, Height 5.5 mm, -25 to 85 degC, RoHS, Tape and Reel", Colour=Black, Current Rating="3 A", Max Operating Temperature=105degC, Min Operating Temperature=-65degC, Package Quantity=100, ComponentLink1Description="Manufacturer URL", ComponentLink1URL=http://www.jst.com/home2.html, ComponentLink2Description=Datasheet, ComponentLink2URL=http://www.jst-mfg.com/product/pdf/eng/ePH.pdf, Contact Finish=Lead, Contact Material=Bronze, Contact Plating=Tin, DatasheetVersion=Dec-12, Height="8.13 mm", Lead Pitch="0.1 inch", Length="101.19 mm", Mount="Through Hole", PackageDescription="Male Header, Pitch 2 mm, 1 x 2 Position, Height 5.5 mm", PackageReference=S2B-PH-SM4-TB(LF)(SN)-2, Packaging=Bulk, Pins=40, Radiation Hardening=No, RoHSCompliant=True, Width="2.34 mm"
P?: "Header, 20-Pin", LatestRevisionDate=17-Jul-2002, LatestRevisionNote="Re-released for DXP Platform.", Publisher="Altium Limited"
"PIN OUT HEADER ?" "PIN OUT HEADER ?": "Header, 10-Pin", LatestRevisionDate=17-Jul-2002, LatestRevisionNote="Re-released for DXP Platform.", Publisher="Altium Limited"
Q1: "MOS(场效应管)", Package=SOT-23, SuppliersPartNumber=C15127, ComponentLink1Description=供应商链接, ComponentLink1URL=http://www.szlcsc.com/product/details_15801.html, Supplier=LC
Q2 Q3: library part CMP-1048-00631-1, "General Purpose Transistor, NPN Silicon, 3-Pin SOT-23, Pb-Free, Tape and Reel / MMBT3904LT1G", Manufacturer="On Semiconductor", PartNumber=MMBT3904LT1G, ComponentLink1Description="Manufacturer URL", ComponentLink1URL=http://www.onsemi.com/, ComponentLink2Description=Datasheet, ComponentLink2URL=http://www.onsemi.cn/pub_link/Collateral/MMBT3904LT1-D.PDF, ComponentLink3Description="Package Specification", ComponentLink3URL=http://www.onsemi.cn/pub_link/Collateral/318-08.PDF, DatasheetVersion="Rev. 12", fT Min (MHz)=300, IC Continuous (A)=0.2, Mounting Technology="Surface Mount", PackageDescription="3-Pin Small Outline Transistor, Body 2.92 x 1.3 mm, Pitch 0.95 mm", PackageReference=SOT-23-3-318-08, PackageVersion="Rev. AP, 11/2009", Packing="Tape and Reel", Polarity=NPN, RoHS=TRUE
R1 R2: library part "0603 22Ω (22R0) 1%", "贴片电阻", Package=0603, SuppliersPartNumber=C23345, ComponentLink1Description=供应商链接, ComponentLink1URL=http://www.szlcsc.com/product/details_24078.html, Supplier=LC
R3 R6 R13 R18 R19: library part "0603 1KΩ (1001) 1%", "贴片电阻", Package=0603, SuppliersPartNumber=C21190, ComponentLink1Description=供应商链接, ComponentLink1URL=http://www.szlcsc.com/product/details_21904.html, Supplier=LC
R4 R5 R7 R8 R10 R11 R14: library part "0603 10KΩ (1002) 1%", "贴片电阻", Package=0603, SuppliersPartNumber=C25804, ComponentLink1Description=供应商链接, ComponentLink1URL=http://www.szlcsc.com/product/details_26547.html, Supplier=LC
R9 R12: library part "0603 1MΩ (1004) 1%", "贴片电阻", Package=0603, SuppliersPartNumber=C22935, ComponentLink1Description=供应商链接, ComponentLink1URL=http://www.szlcsc.com/product/details_23662.html, Supplier=LC
R15: library part "0603 22KΩ (2202) 1%", "贴片电阻", Package=0603, SuppliersPartNumber=C31850, ComponentLink1Description=供应商链接, ComponentLink1URL=http://www.szlcsc.com/product/details_32812.html, Supplier=LC
R16: library part "0603 47KΩ (4702) 1%", "贴片电阻", Package=0603, SuppliersPartNumber=C25819, ComponentLink1Description=供应商链接, ComponentLink1URL=http://www.szlcsc.com/product/details_26562.html, Supplier=LC
R17: library part "0603 4.7KΩ (4701) 1%", "贴片电阻", Package=0603, SuppliersPartNumber=C23162, ComponentLink1Description=供应商链接, ComponentLink1URL=http://www.szlcsc.com/product/details_23889.html, Supplier=LC
R? R?: library part "0603 39KΩ (3902) 1%", "贴片电阻", Package=0603, SuppliersPartNumber=C23153, ComponentLink1Description=供应商链接, ComponentLink1URL=http://www.szlcsc.com/product/details_23880.html, Supplier=LC
RA: library part "0603 15KΩ (1502) 1%", "贴片电阻", Package=0603, SuppliersPartNumber=C22809, ComponentLink1Description=供应商链接, ComponentLink1URL=http://www.szlcsc.com/product/details_23536.html, Supplier=LC
RB: library part "0603 100KΩ (1003) 1%", "贴片电阻", Package=0603, SuppliersPartNumber=C25803, ComponentLink1Description=供应商链接, ComponentLink1URL=http://www.szlcsc.com/product/details_26546.html, Supplier=LC
RESET1: library part CMP-1452-00002-1, "WS-TASV SMD Tact Switch 6X6 mm", Manufacturer="Wuerth Elektronik", PartNumber=430152043836, ComponentLink1Description="Manufacturer URL", ComponentLink1URL=http://www.we-online.com, ComponentLink2Description=Datasheet, ComponentLink2URL=http://katalog.we-online.de/em/datasheet/4301x2.pdf, NoPins=04, PackageReference=430152043836
Rp1 Rp3: library part "0603*4  1KΩ (102) 5%", "贴片排阻", Package=0603*4, SuppliersPartNumber=C20197, ComponentLink1Description=供应商链接, ComponentLink1URL=http://www.szlcsc.com/product/details_20907.html, Supplier=LC
Rp2: library part "0603*4 470Ω (471) 5%", "贴片排阻", Package=0603*4, SuppliersPartNumber=C25510, ComponentLink1Description=供应商链接, ComponentLink1URL=http://www.szlcsc.com/product/details_26253.html, Supplier=LC
SW1 SW2 SW?: library part CMP-2000-07511-1, "FSMSM Push Button Switch, 50 mA, -35 to 85 degC, 2-Pin SMD, RoHS, Bulk", Case\/Package=SMD/SMT, Contact Current Rating=50mA, Contact Resistance=100mOhm, Manufacturer="TE Connectivity", Max Operating Temperature=85degC, Max Voltage Rating (DC)=12V, Min Operating Temperature=-35degC, Operating Force=180gf, Package Description="2-Pin Surface Mount Device, Body 6 x 3.5 mm, Pitch 9.19 mm", Package Quantity=1000, Package Reference=FSMSM, Voltage Rating (DC)=24V, Actuator Length=1.07mm, Actuator Material=Polyamide, Contact Material=Brass, Contact Plating=Silver, Current Rating=50mA, Datasheet URL=http://www.te.com/commerce/DocumentDelivery/DDEController?Action=showdoc&DocId=Customer+Drawing%7F1437566-3%7FC2%7Fpdf%7FEnglish%7FENG_CD_1437566-3_C2_1437566_3_1_c.dwg.pdf%7F1437566-3, Datasheet Version="Rev. C2, 08/2014", Electrical Life=20000Cycles, ELV=Compliant, Illumination Type=Illuminated, Lead Free=LeadFree, Manufacturer URL=http://www.te.com/, Mechanical Life=20000Cycles, Mount=SurfaceMount, Mounting Technology=SurfaceMount, Orientation=Straight, Packaging=LoosePiece, REACH SVHC=Unknown, RoHSCompliant=true, Switch Travel=0.25mm, Termination=GullWing, Throw Configuration=SPST
U1: library part LM358DR2G_[C7950], "通用运放", Package=SOIC-8, SuppliersPartNumber=C7950, ComponentLink1Description=供应商链接, ComponentLink1URL=http://www.szlcsc.com/product/details_8427.html, Supplier=LC